# Altium PCB RFBoard.PcbDoc
Units mm, origin at the board's own origin, x right, y up, seen from the top; angles counter-clockwise.
Board outline 77 x 52 mm, 2 copper layers (Top Layer, Bottom Layer); 9 components, 7 nets, 37 pads, 2 vias.
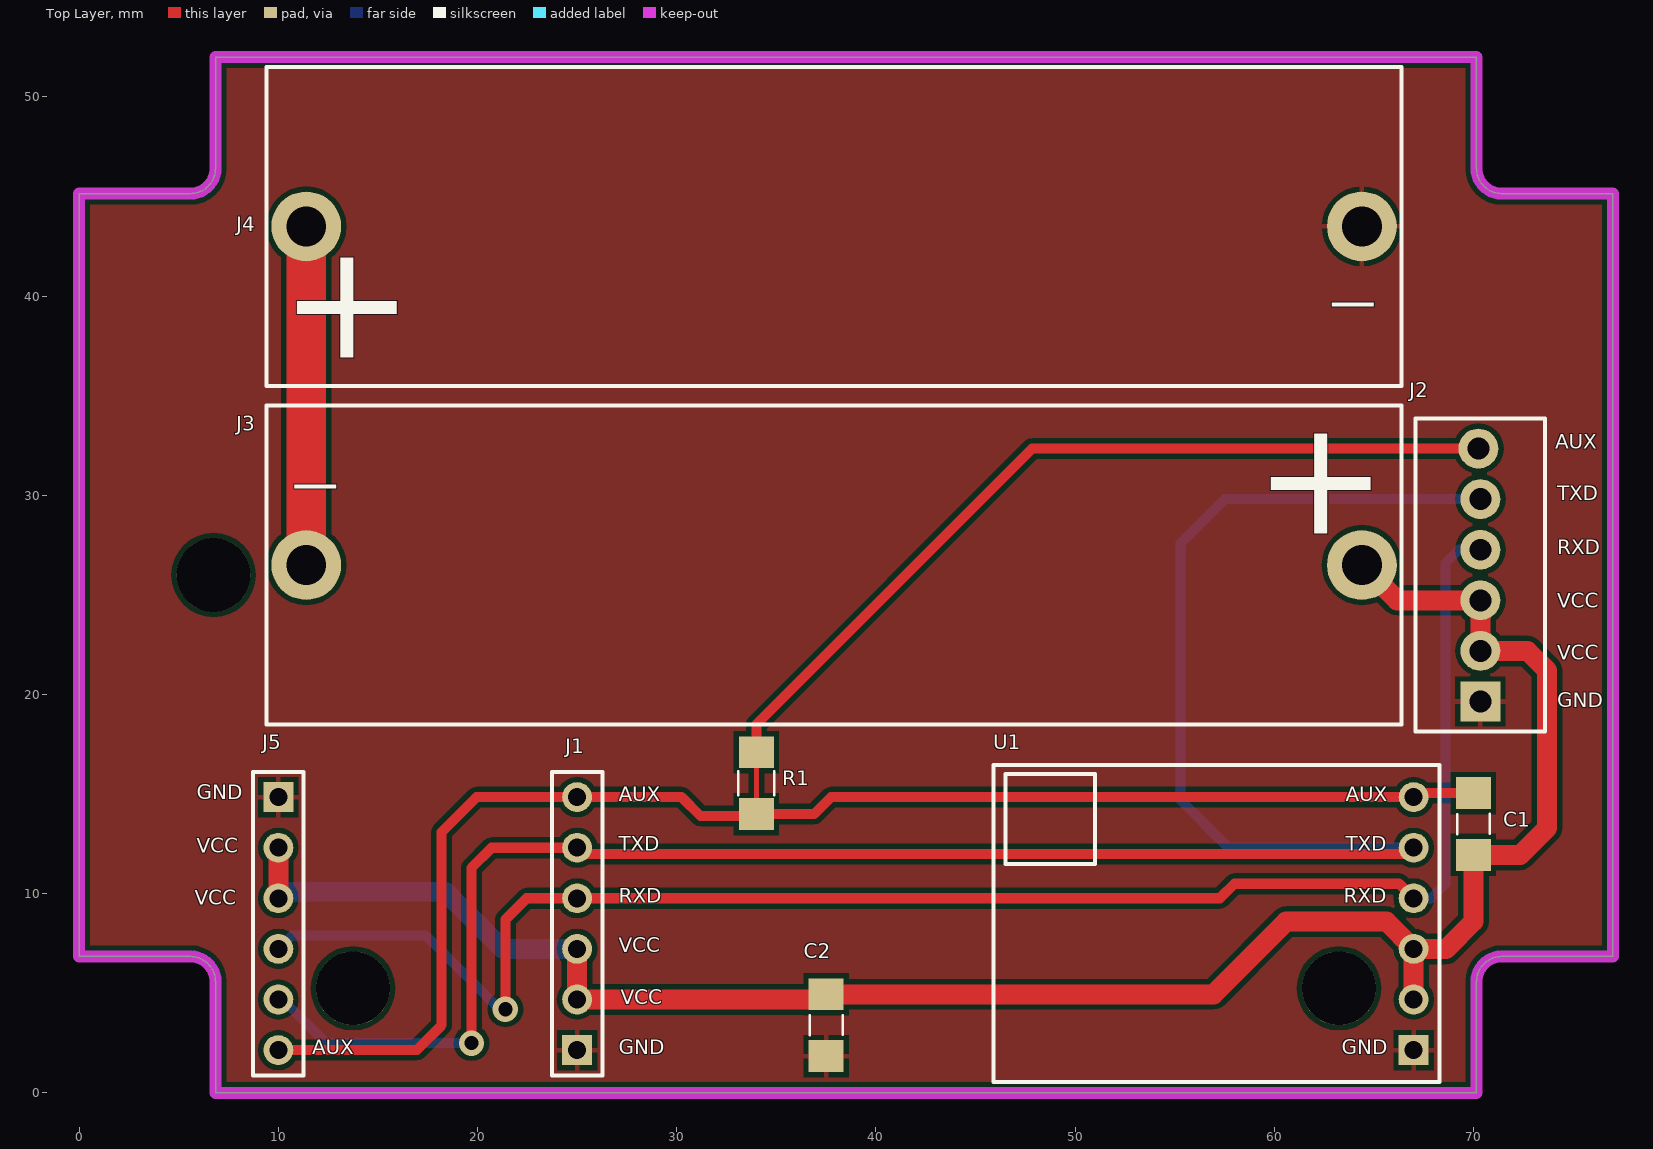
[diagram p0: Top Layer view]
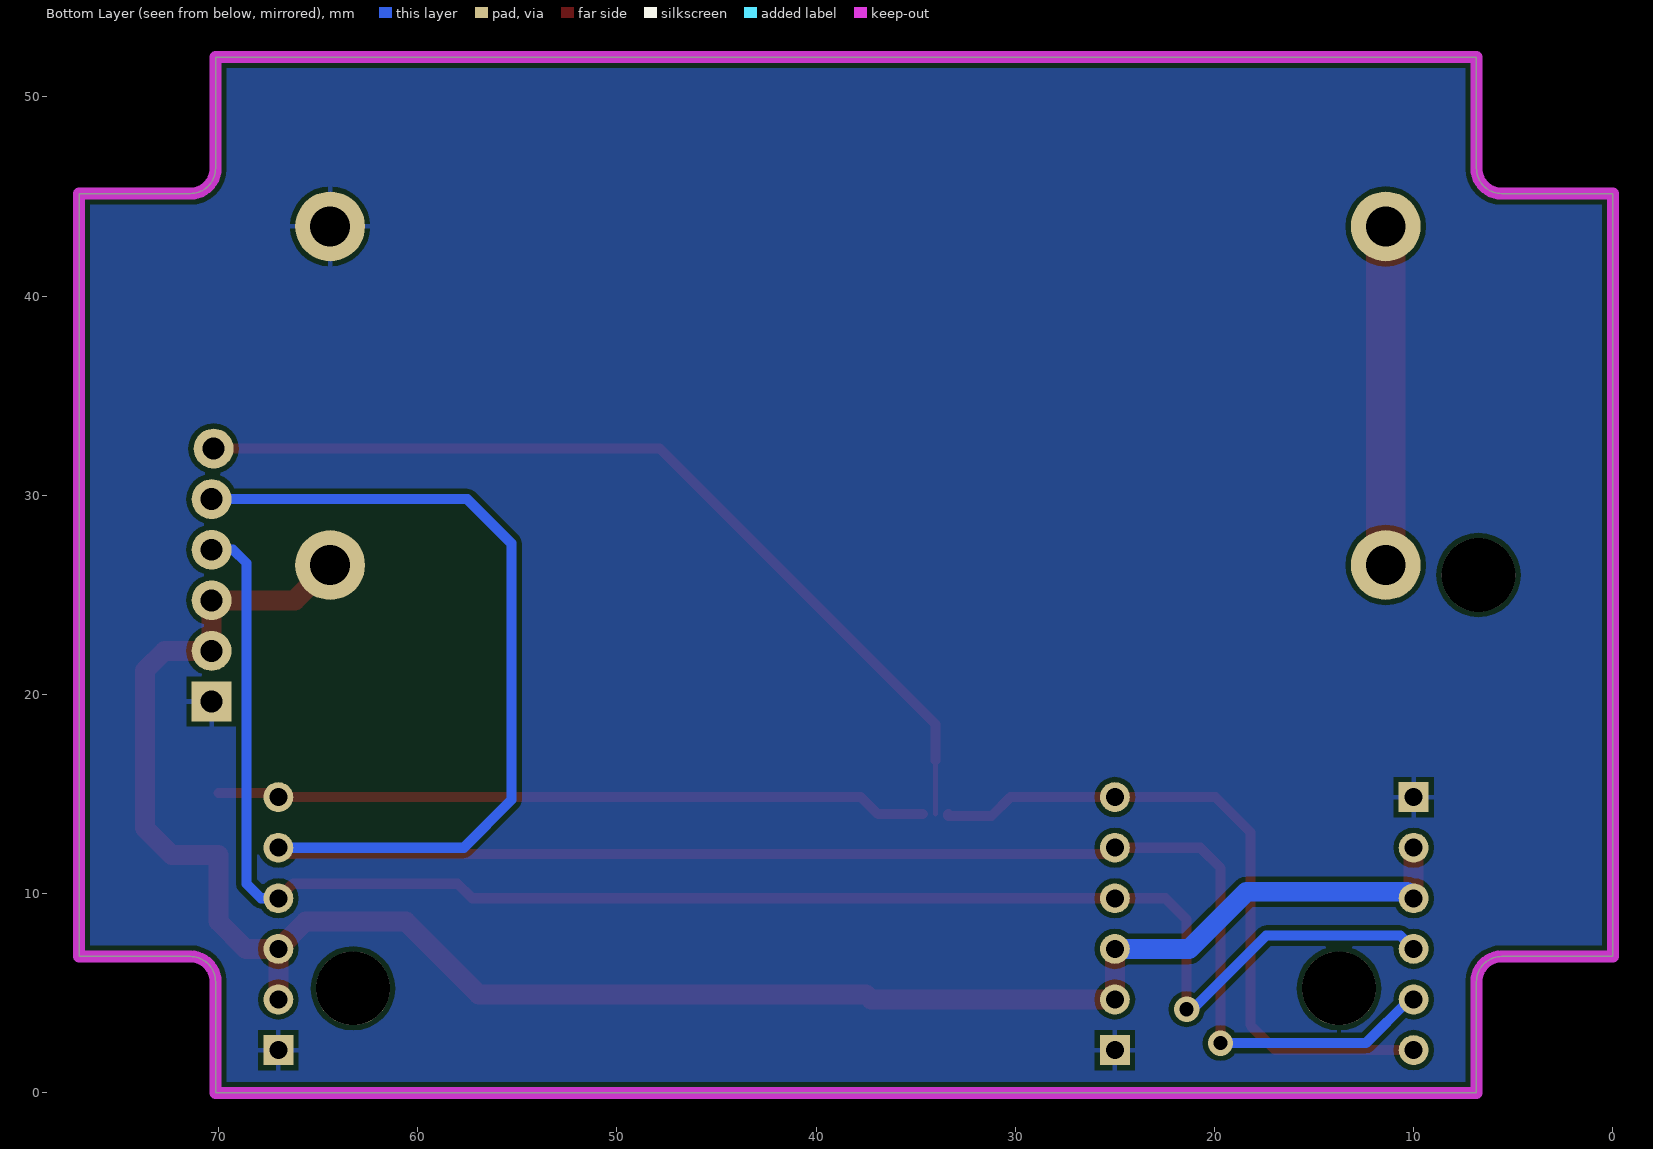
[diagram p1: Bottom Layer view, seen from below]
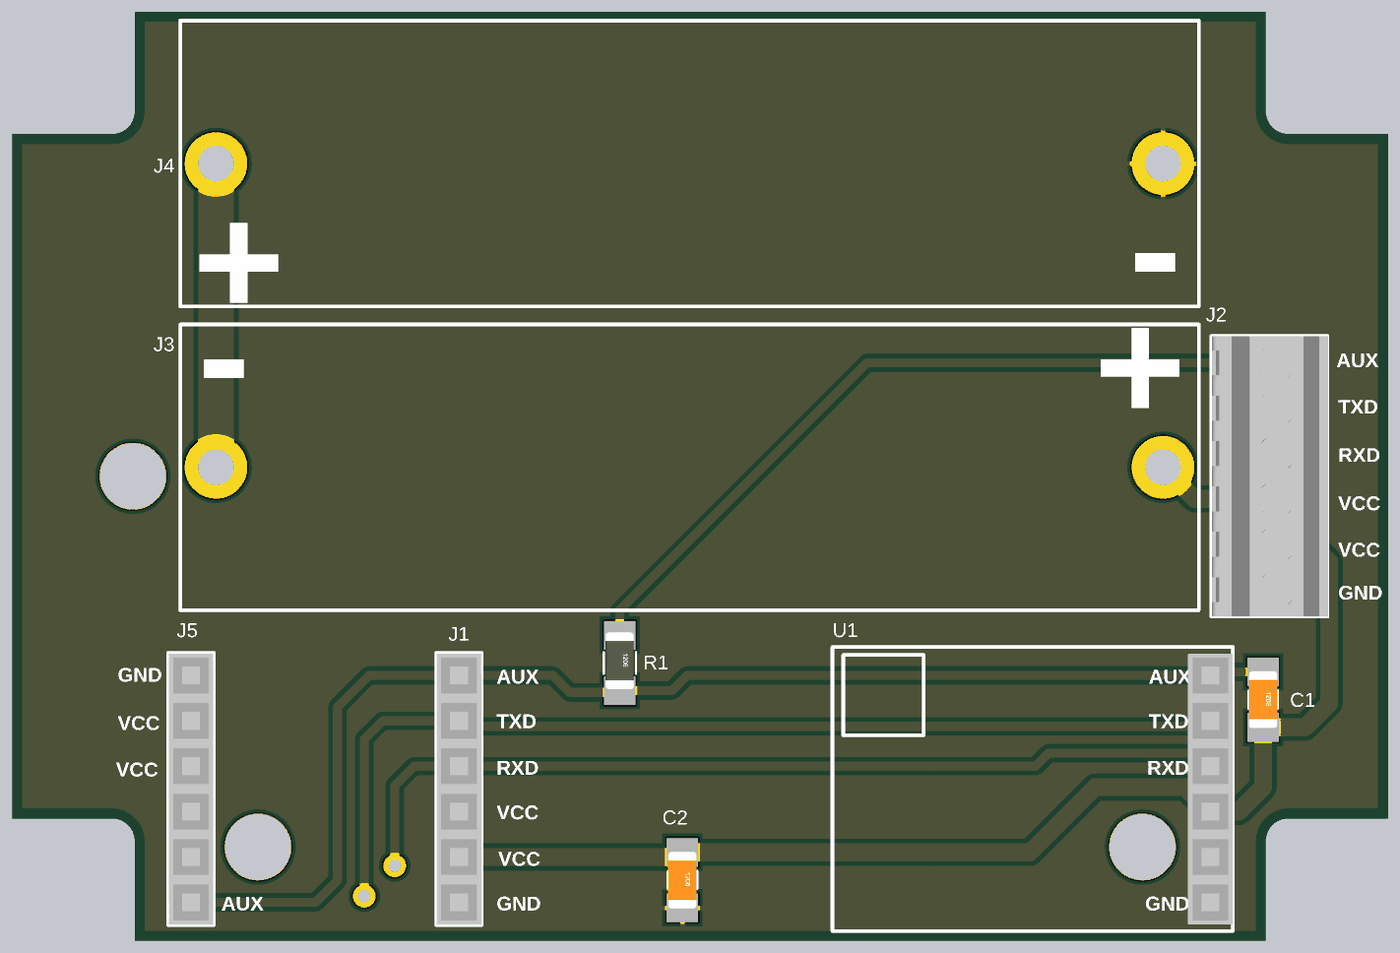
[diagram p2: 3D render of the assembled board from above, using the file's embedded part models]

## Layer stack, top to bottom
Top Solder: solder mask 0.0102, Solder Resist, Dk 3.5
Top Layer: signal copper 0.0356
Dielectric 1: dielectric 0.32, FR-4, Dk 4.8
Bottom Layer: signal copper 0.0356
Bottom Solder: solder mask 0.0102, Solder Resist, Dk 3.5

## Board outline
0,6.85 5.58,6.85 cw(c5.58,5.58) 6.85,5.58 6.85,0 70.15,0 70.15,5.58 cw(c71.42,5.58) 71.42,6.85 77,6.85 77,45.15 71.42,45.15 cw(c71.42,46.42) 70.15,46.42 70.15,52 6.85,52 6.85,46.42 cw(c5.58,46.42) 5.58,45.15 0,45.15

## Design rules (kind name [scope] priority, off if disabled: settings)
Clearance [All] p1: gap=0.254 ignorepadtopadclearanceinfootprint=TRUE except(0: Arc-Hole Track-Hole SMDPad-Hole THPad-Hole Via-Hole Fill-Hole Poly-Hole Region-Hole Text-Hole)
PolygonConnect [All] p1: connectstyle=Relief reliefconductorwidth=0.254 reliefentries=4 polygonreliefangle="90 Angle" airgapwidth=0.254
RoomDefinition RFBoard_V1R1 [InComponentClass('RFBoard_V1R1')] p1: confinementstyle=ConfineIn formatcopy=TRUE lockcomponents=FALSE outline 0,0 0,52 77,52 77,0
RoutingVias [All] p1: holewidth=0.4 width=0.8 viastyle="Through Hole" minholewidth=0.4 minwidth=0.8 maxholewidth=1.27 maxwidth=2.54
SolderMaskExpansion [All] p1: expansion=0.102
Width [All] p1: maxlimit=2.5 minlimit=0.254 preferedwidth=0.508
30 further rules are at their usual default settings.

## Components (designator, comment, footprint, x,y, rotation, side; value= is the part's Value field where it differs from the comment)
C1 "104pF" C1206 70,13.5 r270 top
C2 "0.1uF" C1206 37.5,3.4 r270 top
J1 "75915-306LF" HDR1X6_FEMALE-(75915-306LF) 25,8.5 r90 top
J2 "282834-6" TB1X6_P2.54-(282834-6) 70.3,26 r90 top
J3 "BATT-2PIN" BATT-AA-1 37.9,26.5 r180 top
J4 "BATT-2PIN" BATT-AA-1 37.9,43.5 r0 top
J5 "75915-306LF" HDR1X6_FEMALE-(75915-306LF) 10,8.5 r270 top
R1 "0R" R1206-SHORT 34,15.55 r270 top
U1 "RF5151" RF5151 67,8.5 r180 top

## Footprints (in the part's own frame and the unit in brackets; to place one, negate y for a bottom-side part, rotate by r counter-clockwise, add the part's x,y. Pads: shape width x height; smd on the part's side, far side on the other; paste and mask are expansions set on the pad)
BATT-AA-1 [mm]
  round 3.5 hole 2: 1(-26.5,0) 2(26.5,0)
  silkscreen extent -28.5,-8 28.5,8, body extent -28.5,-8 28.5,8, height 13.5
C1206 [mm]
  rect 1.6x1.75 smd mask+0.102: 1(-1.55,0) 2(1.55,0)
  silkscreen extent -0.51,-0.81 0.52,0.83, body extent -1.6,-0.8 1.6,0.8, height 1
HDR1X6_FEMALE-(75915-306LF) [mm] "CONN HEADER 6 POS 2.54"
  rect 1.5x1.5 hole 0.9: 1(-6.35,0)
  round 1.5 hole 0.9: 2(-3.81,0) 3(-1.27,0) 4(1.27,0) 5(3.81,0) 6(6.35,0)
  silkscreen extent -7.62,-1.27 7.62,1.27, body extent -7.58,-1.25 7.58,1.25, height 8.5
R1206-SHORT [mm]
  rect 1.6x1.75 smd mask+0.102: 1(-1.55,0) 2(1.55,0)
  Top Layer lines w0.254: 1.55,0 -1.15,0 -1.55,0
  silkscreen extent -0.6,-0.9 0.6,0.9, body extent -1.73,-0.8 1.47,0.8, height 1
RF5151 [mm]
  rect 1.5x1.5 hole 0.9: 1(0,6.35)
  round 1.5 hole 0.9: 2(0,3.81) 3(0,1.27) 4(0,-1.27) 5(0,-3.81) 6(0,-6.35)
  silkscreen extent -1.3,-7.95 21.1,7.95, body extent -1.3,-7.9 21,8.1, height 10.9
TB1X6_P2.54-(282834-6) [mm]
  rect 2x2 hole 1.1: 1(-6.35,-0.05)
  round 2 hole 1.1: 2(-3.81,-0.05) 3(-1.27,-0.05) 4(1.27,-0.05) 5(3.81,-0.05) 6(6.35,0.05)
  silkscreen extent -7.85,-3.3 7.85,3.2, body extent -7.85,-3.35 7.85,3.15, height 10.05

## Part data
C1 C2: library part CAP_CERAMIC
J1 J2 J5: library part HDR1X6
R1: library part RES
U1: MFR Part No.=RF5151

## Free pads (board coordinates)
  round 3.7 hole 3.7: HOLE(6.75,26) HOLE(13.75,5.25) HOLE(63.25,5.25)

## Via types
v1: diameter 1.27, hole 0.711, Top Layer to Bottom Layer, 2 vias

## Nets (pads, with @x,y where several pads share a name; then routed paths per layer and width w, separated by ;. In a path a pad name is that pad's centre, name@x,y a point inside that pad or via, vN(x,y) a via of type N, cw(c..) or ccw(c..) an arc to the next point about the centre after c; other vN are vias at no path point)
AUX: J2.6 R1.1 | length 43.8
  Top Layer w0.508: R1.1@34,16.7 R1.1 34,18.5 47.85,32.35 J2.6
AUX-IN: C1.1 J1.6 J5.6 R1.2 U1.6 | length 70.6
  Top Layer w0.508: J5.6 16.95,2.15 18.2,3.4 18.2,13.1 19.95,14.85 J1.6 30.25,14.85 31.2,13.9 33.365,13.9 R1.2@33.365,14 ; R1.2@34.635,14 36.9,14 37.75,14.85 U1.6 67.2,15.05 C1.1
GND: C2.2 J1.1 J2.1 J4.2 J5.1 U1.1
NetJ3_2: J3.2 J4.1 | length 17
  Top Layer w2: J3.2 J4.1
RXD: J1.4 J2.4 J5.4 U1.4 | length 84.4
  Top Layer w0.508: v1(21.4,4.2) 21.4,8.7 22.47,9.77 J1.4 57.27,9.77 58,10.5 66.27,10.5 U1.4
  Bottom Layer w0.508: J5.4 10.67,7.9 17.4,7.9 21.1,4.2 v1(21.4,4.2) ; U1.4 67.87,9.77 68.6,10.5 68.6,26.6 69.27,27.27 J2.4
TXD: J1.5 J2.5 J5.5 U1.5 | length 108.9
  Top Layer w0.508: v1(19.7,2.5) 19.7,11.3 20.71,12.31 J1.5 25.31,12 66.69,12 U1.5
  Bottom Layer w0.508: J5.5 10.21,4.69 12.4,2.5 v1(19.7,2.5) ; U1.5 57.69,12.31 55.3,14.7 55.3,27.6 57.51,29.81 J2.5
VCC: C1.2 C2.1 J1.2 J1.3 J2.2 J2.3 J3.1 J5.2 J5.3 U1.2 U1.3 | length 100.2
  Top Layer w1: J5.3 J5.2 ; J1.3@24.97,7.2 J1.3 J1.2 37.24,4.69 C2.1 56.95,4.95 60.6,8.6 65.63,8.6 U1.3 ; J3.1 66.17,24.73 J2.3 J2.2 72.71,22.19 73.7,21.2 73.7,13.3 72.35,11.95 C1.2 70,8.6 68.63,7.23 U1.3 ; U1.2 U1.3
  Bottom Layer w1: J5.3 10.33,10.1 18.4,10.1 21.27,7.23 J1.3

## Polygon pours and split planes (outlines as drawn)
GND on Top Layer "GND_L01_P000" (solid, remove dead copper, pour order 0): 0,0 0,52 77,52 77,0
GND on Bottom Layer "GND_L02_P002" (solid, remove dead copper, pour order 2): 0,0 0,52 77,52 77,0

## Keep-outs
Keep-Out Layer:
  the board outline again, w0.6

## Silkscreen, mask and mechanical layers (free items; w line width, h text height)
Top Overlay:
  text "AUX" at 74.1,32.1 h1.27
  text "TXD" at 74.2,29.5 h1.27
  text "RXD" at 74.2,26.8 h1.27
  text "VCC" at 74.2,24.1 h1.27
  text "VCC" at 74.2,21.5 h1.27
  text "GND" at 74.2,19.1 h1.27
  text "GND" at 5.9,14.5 h1.27
  text "AUX" at 27.1,14.4 h1.27
  text "AUX" at 63.6,14.4 h1.27
  text "TXD" at 27.1,11.9 h1.27
  text "TXD" at 63.6,11.9 h1.27
  text "VCC" at 5.9,11.8 h1.27
  text "RXD" at 27.1,9.3 h1.27
  text "RXD" at 63.5,9.3 h1.27
  text "VCC" at 5.8,9.2 h1.27
  text "VCC" at 27.1,6.8 h1.27
  text "VCC" at 27.2,4.2 h1.27
  text "AUX" at 11.7,1.7 h1.27
  text "GND" at 27.1,1.7 h1.27
  text "GND" at 63.4,1.7 h1.27
Mechanical 1:
  the board outline again, w0.1

## Dimensions
6.85,52 to 6.85,0 on Mechanical 1
0,45.15 to 0,6.85 on Mechanical 1
0,6.85 to 77,6.85 on Mechanical 1
6.85,0 to 70.15,0 on Mechanical 1

## Text inside footprints (layer, text, board x,y; h text height)
J3: Top Overlay "+" at 65.7,35 h10 r180; Top Overlay "-" at 13.3,34.3 h10 r180
J4: Top Overlay "+" at 10.1,35 h10; Top Overlay "-" at 62.5,35.7 h10